# Altium PCB 11BRANSEB30E2.PcbDoc
Units mm, origin at the board's own origin, x right, y up, seen from the top; angles counter-clockwise.
Board outline 7 x 19.9 mm, 2 copper layers (Top Layer, Bottom Layer), stack 0.4 mm thick; 2 components, 4 nets, 16 pads, 8 vias.
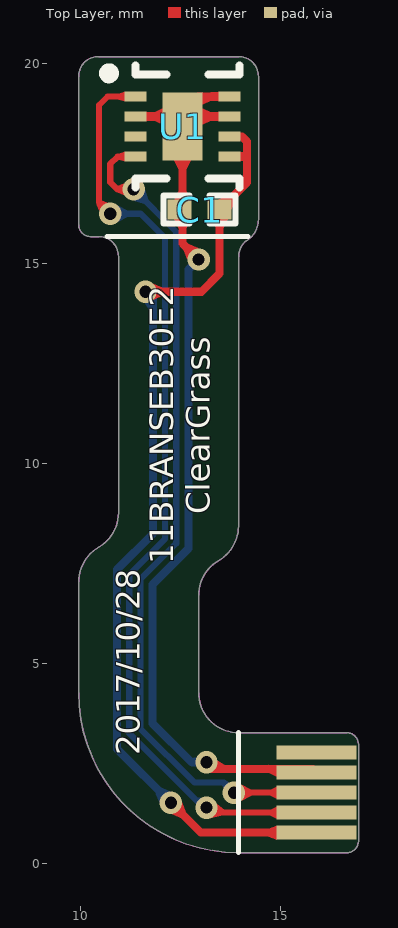
[diagram p0: Top Layer view]
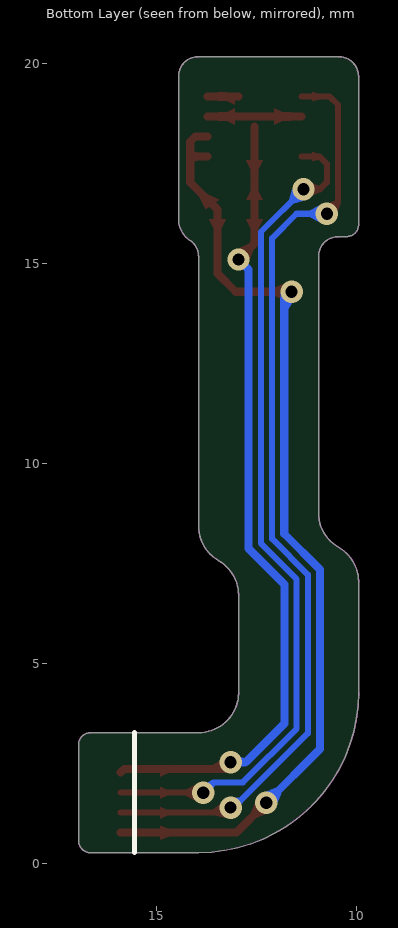
[diagram p1: Bottom Layer view, seen from below]

## Layer stack, top to bottom
Top Solder: solder mask 0.0102, Solder Resist, Dk 3.5
Top Layer: signal copper 0.0356
Dielectric1: core 0.329, FR-4, Dk 4.8
Bottom Layer: signal copper 0.0356
Bottom Solder: solder mask 0.0102, Solder Resist, Dk 3.5

## Board outline
9.959,4.277 9.959,7.045 cw(c10.959,7.045) 10.459,7.911 ccw(c9.959,8.777) 10.959,8.777 10.959,15.18 ccw(c10.459,15.18) 10.459,15.68 10.259,15.68 cw(c10.259,15.98) 9.959,15.98 9.959,19.68 cw(c10.459,19.68) 10.459,20.18 13.959,20.18 cw(c13.959,19.68) 14.459,19.68 14.459,16.117 cw(c13.818,16.117) 14.138,15.562 14.139,15.562 ccw(c14.463,15.177) 13.959,15.177 13.959,8.444 cw(c12.959,8.444) 13.459,7.578 ccw(c13.959,6.712) 12.959,6.712 12.959,4.277 ccw(c13.959,4.277) 13.959,3.277 16.659,3.277 cw(c16.659,2.977) 16.959,2.977 16.959,0.577 cw(c16.659,0.577) 16.659,0.277 13.959,0.277 cw(c13.959,4.277)

## Design rules (kind name [scope] priority, off if disabled: settings)
Clearance Clearance_1 [All] p1: gap=0.127
Clearance [All] p2: gap=0.254
ComponentClearance [All] p1 off: gap=0.254 collisioncheckmode=3 verticalgap=0.254 showdistances=FALSE
FabricationTestPointUsage TestPointUsage [All] p1: valid=0 allowmultiple=FALSE
FabricationTestpoint Testpoint [All] p1: side=3 testpointundercomponent=TRUE minsize=1.016 maxsize=2.54 preferedsize=1.524 minholesize=0 maxholesize=1.016 preferedholesize=0.813 testpointgrid=0.025 allowsidetop=TRUE allowsidebottom=TRUE usegrid=TRUE gridtolerance=0
HoleToHoleClearance [All] p1 off: gap=0.254 allowstackedmicrovias=TRUE
MinimumSolderMaskSliver [All] p1 off: minsoldermaskwidth=0.254
PolygonConnect [All] p1: connectstyle=Direct reliefconductorwidth=0.254 reliefentries=4 polygonreliefangle="90 Angle" airgapwidth=0.254
RoutingVias [All] p1: holewidth=0.305 width=0.559 viastyle="Through Hole" minholewidth=0.305 minwidth=0.559 maxholewidth=0.711 maxwidth=1.27
SilkToSilkClearance [All] p1 off: silktosilkclearance=0.254
SilkToSolderMaskClearance SilkscreenOverComponentPads [IsPad] p1 off: minsilkscreentomaskgap=0.254 clearancetoexposedcopper=TRUE
SolderMaskExpansion [All] p1: expansion=0.102
Width [All] p1: maxlimit=0.762 minlimit=0.152 preferedwidth=0.254
23 further rules are at their usual default settings.

## Components (designator, comment, footprint, x,y, rotation, side; value= is the part's Value field where it differs from the comment)
C1 "0.1uF/10V" 0402C 12.986,16.352 r180 top
U1 "SHT31" DFN 12.559,18.43 r270 top

## Footprints (in the part's own frame and the unit in brackets; to place one, negate y for a bottom-side part, rotate by r counter-clockwise, add the part's x,y. Pads: shape width x height; smd on the part's side, far side on the other; paste and mask are expansions set on the pad)
0402C [mm]
  rect 0.6x0.5 smd: 1(-0.5,0) 2(0.5,0)
  silkscreen extent -0.9,-0.35 0.9,0.35, body extent -0.51,-0.25 0.51,0.25, height 0.5
DFN [mm] "QFN, 8-Leads, Body 2.6x2.6mm (max), Pitch 0.50mm, IPC Mediu"
  rect 0.25x0.55 smd: 1(-0.75,-1.175) 2(-0.25,-1.175) 3(0.25,-1.175) 4(0.75,-1.175) 5(0.75,1.175) 6(0.25,1.175) 7(-0.25,1.175) 8(-0.75,1.175)
  rect 1.7x1 smd: 9(0,0)
  silkscreen extent -1.53,-1.97 1.53,1.43, body extent -1.48,-1.55 1.51,1.55, height 1

## Part data
C1: library part CAP, "厂家：Murata，型号：GRM155R71A10"
U1: "厂家：盛思睿，型号：SHT31"

## Free pads (board coordinates)
  rect 2x0.35 smd: 1(15.909,0.777) 2(15.909,1.277) 3(15.909,1.777) 4(15.909,2.277) 5(15.909,2.777)

## Via types
v1: diameter 0.559, hole 0.305, Top Layer to Bottom Layer, tented both sides, 8 vias

## Nets (pads, with @x,y where several pads share a name; then routed paths per layer and width w, separated by ;. In a path a pad name is that pad's centre, name@x,y a point inside that pad or via, vN(x,y) a via of type N, cw(c..) or ccw(c..) an arc to the next point about the centre after c; other vN are vias at no path point)
3.3V: C1.1 pad.1 U1.5 U1.6 | length 24.3
  Top Layer w0.203: v1(11.633,14.3) 13.03,14.3 13.486,14.756 C1.1 14.167,17.034 14.167,17.673 ; v1(12.268,1.524) 13.015,0.777 pad.1 ; U1.5 14.161,17.68 14.167,17.673 ; U1.6 14.042,18.18 14.167,18.054 14.167,17.673
  Bottom Layer w0.203: v1(11.633,14.3) 11.818,14.116 11.818,8.25 10.922,7.354 10.922,2.87 v1(12.268,1.524)
GND: C1.2 pad.4 U1.2 U1.7 U1.8 U1.9 | length 23.3
  Top Layer w0.203: U1.2 U1.7 ; U1.9 12.559,15.509 v1(12.961,15.108) ; U1.9@12.961,19.18 U1.8 ; v1@13.081,2.54 v1(13.157,2.54) 13.324,2.373 15.813,2.373 pad.4
  Bottom Layer w0.203: v1(12.961,15.108) 12.707,14.854 12.707,7.881 11.811,6.985 11.811,3.505 12.776,2.54 v1@13.081,2.54
T_SCL: pad.3 U1.4 | length 21.2
  Top Layer w0.152: v1(11.335,16.86) 10.929,16.86 10.751,17.038 10.751,17.495 10.935,17.68 U1.4 ; v1(13.843,1.777) pad.3
  Bottom Layer w0.152: v1(11.335,16.86) 12.402,15.794 12.402,8.007 11.506,7.111 11.506,3.379 12.853,2.032 13.588,2.032 v1(13.843,1.777)
T_SDA: pad.2 U1.1 | length 23.7
  Top Layer w0.152: v1(10.751,16.251) 10.472,16.53 10.472,18.969 10.683,19.18 U1.1 ; v1(13.157,1.404) 13.284,1.277 pad.2
  Bottom Layer w0.152: v1(10.751,16.251) 11.511,16.251 12.123,15.64 12.123,8.123 11.227,7.227 11.227,3.263 12.915,1.575 12.986,1.575 v1(13.157,1.404)
pads on no net: U1.3

## Keep-outs
Keep-Out Layer:
  lines w0.013: 9.959,4.277 ccw(c13.959,4.277) 13.959,0.277 16.659,0.277 ccw(c16.659,0.577) 16.959,0.577 16.959,2.977 ccw(c16.659,2.977) 16.659,3.277 13.959,3.277 cw(c13.959,4.277) 12.959,4.277 12.959,6.712 cw(c13.959,6.712) 13.459,7.578 ccw(c12.959,8.444) 13.959,8.444 13.959,15.177 cw(c14.463,15.177) 14.139,15.562 ccw(c13.818,16.117) 14.459,16.117 14.459,19.68 ccw(c13.959,19.68) 13.959,20.18 10.459,20.18 ccw(c10.459,19.68) 9.959,19.68 9.959,15.98 ccw(c10.259,15.98) 10.259,15.68 10.459,15.68 cw(c10.459,15.18) 10.959,15.18 10.959,8.777 cw(c9.959,8.777) 10.459,7.911 ccw(c10.959,7.045) 9.959,7.045 9.959,4.277

## Silkscreen, mask and mechanical layers (free items; w line width, h text height)
Top Overlay:
  lines w0.127: 10.668,15.68 14.2,15.68 ; 13.959,0.277 13.959,3.277
  text "ClearGrass" at 13.437,8.738 h1.02 r90
  text "11BRANSEB30E2" at 12.522,7.493 h1.02 r90
  text "2017/10/28" at 11.684,2.718 h1.02 r90
Bottom Overlay:
  lines w0.127: 15.559,0.277 15.559,3.277
Mechanical 1:
  circle w0.013: c12.559,18.43 r0.75
  circle w0.013: c12.559,18.43 r0.609
  circle w0.013: c12.559,18.43 r0.426
  circle w0.013: c12.559,18.43 r0.284
  lines w0.013: 10.959,15.68 10.959,8.777 cw(c9.959,8.777) 10.459,7.911 ccw(c10.959,7.045) 9.959,7.045 9.959,4.277 ccw(c13.959,4.277) 13.959,0.277 16.959,0.277 ; 11.909,17.18 11.909,17.179 12.109,17.179 12.109,17.18 ; 11.909,19.68 11.909,19.681 12.109,19.681 12.109,19.68 ; 13.009,17.18 13.009,17.179 13.209,17.179 13.209,17.18 ; 13.009,19.68 13.009,19.681 13.209,19.681 13.209,19.68 ; 13.809,17.555 13.81,17.555 13.81,17.805 13.809,17.805 ; 13.809,18.055 13.81,18.055 13.81,18.305 13.809,18.305 ; 13.809,18.555 13.81,18.555 13.81,18.805 13.809,18.805 ; 13.809,19.055 13.81,19.055 13.81,19.305 13.809,19.305 ; 13.959,15.68 13.959,8.444 cw(c12.959,8.444) 13.459,7.578 ccw(c13.959,6.712) 12.959,6.712 12.959,4.277 ccw(c13.959,4.277) 13.959,3.277 16.959,3.277 ; 11.308,17.555 11.308,17.805 ; 11.308,17.555 11.309,17.555 ; 11.308,17.805 11.309,17.805 ; 11.308,18.055 11.308,18.305 ; 11.308,18.055 11.309,18.055 ; 11.308,18.305 11.309,18.305 ; 11.308,18.555 11.308,18.805 ; 11.308,18.555 11.309,18.555 ; 11.308,18.805 11.309,18.805 ; 11.308,19.055 11.308,19.305 ; 11.308,19.055 11.309,19.055 ; 11.308,19.305 11.309,19.305 ; 16.959,0.277 16.959,3.277 ; 16.959,0.277 15.459,0.277 15.459,3.277 16.959,3.277 ; 16.959,0.277 16.959,3.277 ; 9.959,15.68 9.959,20.18 14.459,20.18 14.459,15.68 9.959,15.68 ; 11.309,17.18 11.309,19.68 13.809,19.68 13.809,17.18 11.309,17.18
Mechanical 2:
  lines w0.013: 10.559,18.43 12.559,18.43 ; 12.559,16.43 12.559,18.43 ; 12.559,20.43 12.559,18.43 ; 14.559,18.43 12.559,18.43